# Altium PCB TailLightsPrototypeRev3LEDs.PcbDoc
Units mm, origin at the board's own origin, x right, y up, seen from the top; angles counter-clockwise.
Board outline 64.13 x 24.64 mm, 2 copper layers (Top Layer, Bottom Layer); 13 components, 41 nets, 38 pads, 427 vias.
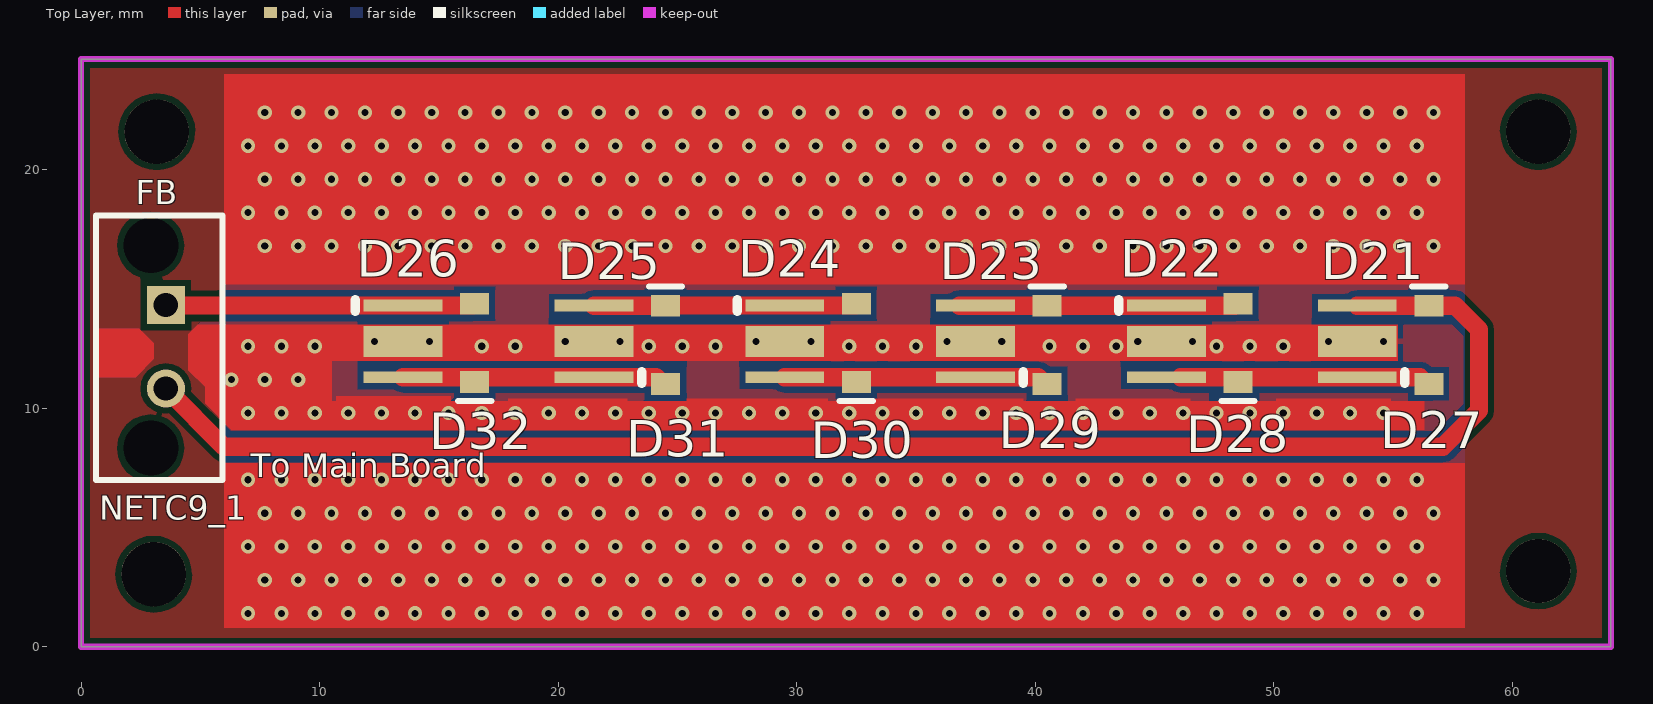
[diagram p0: Top Layer view]
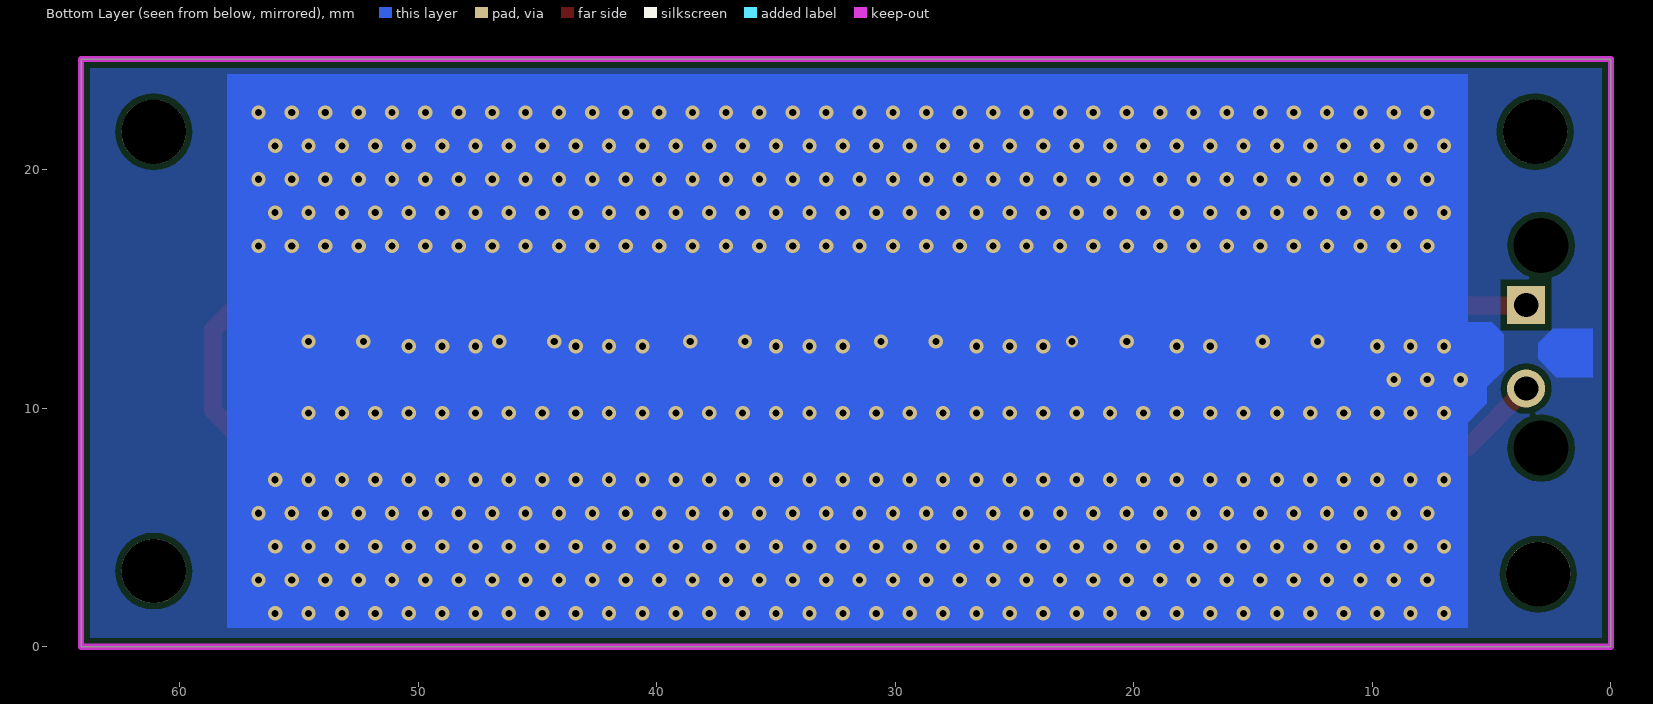
[diagram p1: Bottom Layer view, seen from below]
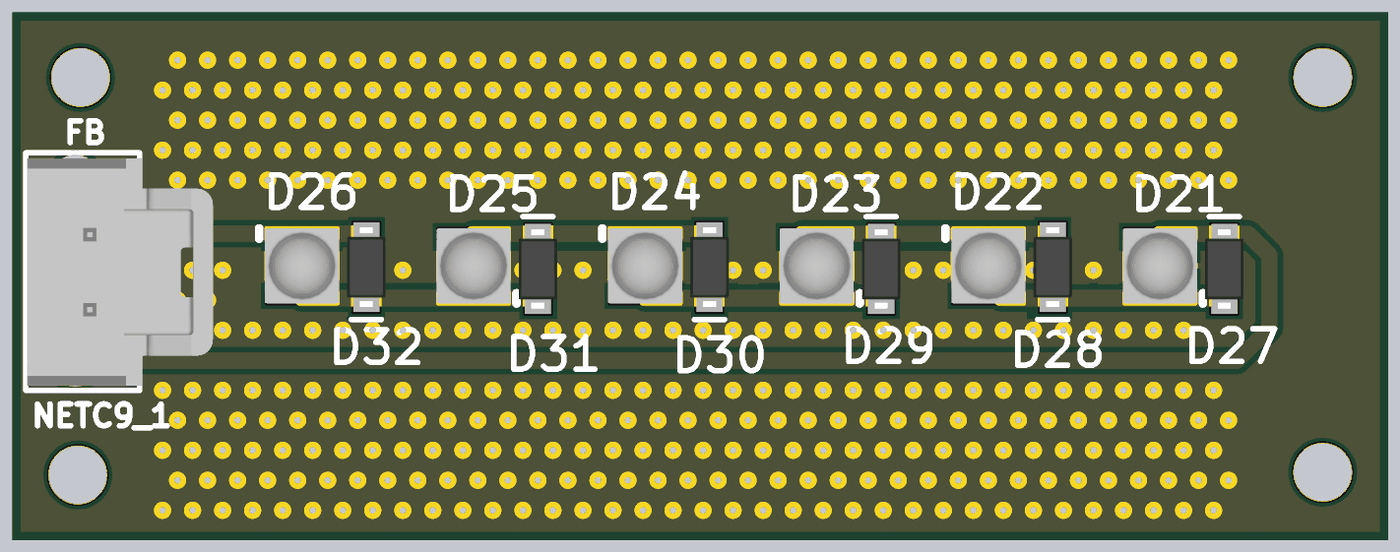
[diagram p2: 3D render of the assembled board from above, using the file's embedded part models]

## Layer stack, top to bottom
Top Solder: solder mask 0.0102, Solder Resist, Dk 3.5
Top Layer: signal copper 0.0356
Dielectric 1: dielectric 0.32, FR-4, Dk 4.8
Bottom Layer: signal copper 0.0356
Bottom Solder: solder mask 0.0102, Solder Resist, Dk 3.5

## Board outline
0,0 64.135,0 64.135,24.638 0,24.638

## Design rules (kind name [scope] priority, off if disabled: settings)
Clearance [All] p1: gap=0.254 ignorepadtopadclearanceinfootprint=FALSE except(0: Arc-Hole Track-Hole SMDPad-Hole THPad-Hole Via-Hole Fill-Hole Poly-Hole Region-Hole Text-Hole)
PolygonConnect [All] p1: connectstyle=Relief reliefconductorwidth=0.254 reliefentries=4 polygonreliefangle="90 Angle" airgapwidth=0.254
RoutingVias [All] p1: holewidth=0.711 width=1.27 viastyle="Through Hole" minholewidth=0.711 minwidth=1.27 maxholewidth=0.711 maxwidth=1.27
SolderMaskExpansion [All] p1: expansion=0.102 istentingtop=FALSE
Width [All] p1: maxlimit=0.762 minlimit=0.254 preferedwidth=0.254 bottomlayer_maxwidth=0.254 minimp=50.000000 maximp=50.000000 favimp=50.000000
30 further rules are at their usual default settings.

## Classes and differential pairs
component class TailLightPrototypeRev3LEDs: D21 D22 D23 D24 D25 D26 D27 D28 D29 D30 D31 "To Main Board"

## Components (designator, comment, footprint, x,y, rotation, side; value= is the part's Value field where it differs from the comment)
D21 "LED XLAMP XP-E RED SMD" "LED CREE XP-E2 1414 2-SMD" 53.5,12.8 r270 top
D22 "LED XLAMP XP-E RED SMD" "LED CREE XP-E2 1414 2-SMD" 45.5,12.8 r90 top
D23 "LED XLAMP XP-E RED SMD" "LED CREE XP-E2 1414 2-SMD" 37.5,12.8 r270 top
D24 "LED XLAMP XP-E RED SMD" "LED CREE XP-E2 1414 2-SMD" 29.5,12.8 r90 top
D25 "LED XLAMP XP-E RED SMD" "LED CREE XP-E2 1414 2-SMD" 21.5,12.8 r270 top
D26 "LED XLAMP XP-E RED SMD" "LED CREE XP-E2 1414 2-SMD" 13.5,12.8 r90 top
D27 "DIODE ZENER 2.4V 500MW SOD123" "DIODE SOD123" 56.5,14.3 r270 top
D28 "DIODE ZENER 2.4V 500MW SOD123" "DIODE SOD123" 48.5,11.1 r90 top
D29 "DIODE ZENER 2.4V 500MW SOD123" "DIODE SOD123" 40.5,14.3 r270 top
D30 "DIODE ZENER 2.4V 500MW SOD123" "DIODE SOD123" 32.5,11.1 r90 top
D31 "DIODE ZENER 2.4V 500MW SOD123" "DIODE SOD123" 24.5,14.3 r270 top
D32 "DIODE ZENER 2.4V 500MW SOD123" "DIODE SOD123" 16.5,11.1 r90 top
"To Main Board" "CONN 2POS ULTRA-FIT 0.138\"" "CONN, 2POS ULTRA-FIT" 3.556,14.327 r270 top (schematic designator P6)

## Footprints (in the part's own frame and the unit in brackets; to place one, negate y for a bottom-side part, rotate by r counter-clockwise, add the part's x,y. Pads: shape width x height; smd on the part's side, far side on the other; paste and mask are expansions set on the pad)
"CONN, 2POS ULTRA-FIT" [mm] "2 Positions Header, Shrouded Connector 0.138\" (3.50mm) Through Hole Gold"
  rect 1.6x1.6 hole 1.02: 1(0,0)
  round 1.6 hole 1.02: 2(3.5,0)
  round 1.6 hole 2.3: ""(-2.5,-0.63) ""(6,-0.63)
  silkscreen extent -3.74,-2.93 7.33,2.37, body extent -3.48,-2.87 7.12,5.79, height 13.85
"DIODE SOD123" [mm]
  rect 0.91x1.22 smd: 1(0,0) 2(3.28,0)
  silkscreen extent -0.8,-0.7 -0.8,0.7, body extent -0.22,-0.9 3.49,0.9, height 1.35
"LED CREE XP-E2 1414 2-SMD" [mm]
  rect 0.5x3.3 smd: 1(-1.5,0) 3(1.5,0)
  rect 1.3x3.3 smd: 2(0,0)
  silkscreen extent 1.27,2 1.75,2, body extent -1.73,-1.73 1.73,1.73, height 2.28

## Part data
D21 D22 D23 D24 D25 D26: "LED Lighting Color XLamp?XP-E2 Red 623nm (620nm ~ 625nm) 1414 (3535 Metric)", Case/Package=SMD/SMT, Color=Red, Forward Voltage=2.2V, Manufacturer=Cree, Manufacturer Part Number=XPEBRD-L1-0000-00902, Max Current Rating=1A, Supplier Part Number 1=XPEBRD-L1-0000-00902CT-ND, Test Current=350mA, Test Temperature=25°C, Thermal Resistance of Package=5°C/W, Lead Free="Lead Free", Mount="Surface Mount", Packaging="Tape and Reel", Pricing 1="1 = 2.00000, 10 = 1.90000, 100 = 1.69980, 250 = 1.54584, 500 = 1.44786 (USD)", RoHS=Yes, Stock 1=1640, Supplier 1=Digi-Key, Viewing Angle=130°, Wavelength=625nm
D27 D28 D29 D30 D31 D32: "Zener Diode 2.4V 500mW ?% Surface Mount SOD-123", Case/Package=SOD-123-2, Forward Voltage=900mV, Manufacturer 1=Diodes, Manufacturer Part Number 1=MMSZ5221B-7-F, Max Operating Temperature=150°C, Max Power Dissipation=500mW, Max Reverse Leakage Current=100uA, Min Operating Temperature=-65°C, Package Quantity=3000, Supplier Part Number 1=MMSZ5221B-FDICT-ND, Test Current=20mA, Tolerance=5%, Voltage Rating (DC)=2.4V, ComponentLink1Description=https://datasheet.ciiva.com/34302/1541079-34302404.pdf?src-supplier=Jameco, ComponentLink1URL=https://datasheet.ciiva.com/34302/1541079-34302404.pdf?src-supplier=Jameco, ComponentLink2Description=https://datasheet.ciiva.com/15142/getdatasheetpartid-61111-15142284.pdf?src-supplier=Verical, ComponentLink2URL=https://datasheet.ciiva.com/15142/getdatasheetpartid-61111-15142284.pdf?src-supplier=Verical, ComponentLink3Description=https://datasheet.ciiva.com/4734/ds18010-38133-4734214.pdf?src-supplier=Mouser, ComponentLink3URL=https://datasheet.ciiva.com/4734/ds18010-38133-4734214.pdf?src-supplier=Mouser, ComponentLink4Description=https://datasheet.ciiva.com/890/ds18010-890793.pdf?src-supplier=Digi-Key, ComponentLink4URL=https://datasheet.ciiva.com/890/ds18010-890793.pdf?src-supplier=Digi-Key, ComponentLink5Description=https://datasheet.ciiva.com/890/ds18010-890794.pdf?src-supplier=Digi-Key, ComponentLink5URL=https://datasheet.ciiva.com/890/ds18010-890794.pdf?src-supplier=Digi-Key, Element Configuration=Single, Height=1.35mm, Impedance=30R, Lead Free="Lead Free", Length=3.85mm, Mount="Surface Mount", Number of Pins=2, Packaging="Tape and Reel", Peak Reverse Current=100uA, Power Dissipation=500mW, Power Rating=500mW, Pricing 1="1=0.19000, 10=0.17800, 100=0.07440, 500=0.05840, 1000=0.04056 (USD)", Radiation Hardening=No, RoHS=Yes, Stock 1=37190, Supplier 1=Digi-Key, Termination=SMD/SMT, Voltage Tolerance=5%, Weight=0.000353oz, Width=1.7mm, Working Voltage=2.4V, Zener Current=100uA, Zener Voltage=2.4V
"To Main Board": "2 Positions Header, Shrouded Connector 0.138\" (3.50mm) Through Hole Gold", Current Rating=-, Insulation Color=Black, Manufacturer 1="Molex, LLC", Manufacturer Part Number 1=1722861302, Material Flammability Rating="UL94 V-0", Operating Temperature="-40°C ~ 120°C", Supplier Part Number 1=WM11673-ND, Voltage=400V, ComponentLink1Description=http://www.molex.com/pdm_docs/sd/1722861302_sd.pdf, ComponentLink1URL=http://www.molex.com/pdm_docs/sd/1722861302_sd.pdf, Connector Type=Header, Contact Finish - Mating=Gold, Contact Finish - Post=Tin, Contact Finish Thickness - Mating="30µin (0.76µm)", Contact Finish Thickness - Post="60µin (1.52µm)", Contact Length - Mating=-, Contact Length - Post="0.126\" (3.20mm)", Contact Material="Copper Alloy", Contact Shape=Square, Contact Type="Male Pin", Fastening Type="Latch Holder", Ingress Protection=-, Insulation Height="0.465\" (11.80mm)", Insulation Material="Liquid Crystal Polymer (LCP)", Mated Stacking Heights=26.99mm, Mounting Type="Through Hole", Number of Positions=2, Number of Positions Loaded=All, Number of Rows=1, Overall Contact Length=-, Packaging=Tray, Part Status=Active, Pitch - Mating="0.138\" (3.50mm)", Row Spacing - Mating=-, Series=UltraFit, Shrouding="Shrouded - 4 Wall", Style="Board to Board or Cable", Supplier 1=Digi-Key, Termination="Kinked Pin, Solder"

## Free pads (board coordinates)
  round 2.7 hole 2.7: ""(3.048,3.048) ""(3.175,21.59) ""(61.087,3.175) ""(61.087,21.59)

## Via types
v1: diameter 0.6, hole 0.3, Top Layer to Bottom Layer, 426 vias
v2: diameter 0.5, hole 0.3, Top Layer to Bottom Layer, 1 vias

## Nets (pads, with @x,y where several pads share a name; then routed paths per layer and width w, separated by ;. In a path a pad name is that pad's centre, name@x,y a point inside that pad or via, vN(x,y) a via of type N, cw(c..) or ccw(c..) an arc to the next point about the centre after c; other vN are vias at no path point)
6V6: 
CTRL: 
FB: "To Main Board.1" D26.3 D32.2 | length 12.9
  Top Layer w0.254: 3.556,14.327 3.58,14.303
  Top Layer w0.762: 3.58,14.303 13.5,14.303 D32.2@16.4,14.303
GND: 
NetC2_1: 
NetC3_1: 
NetC4_1: 
NetC5_2: 
NetC9_1: 
NetC12_1: 
NetC17_1: 
NetD1_3: 
NetD2_3: 
NetD3_3: 
NetD4_3: 
NetD7_3: 
NetD8_3: 
NetD9_1: 
NetD10_3: 
NetD12_3: 
NetD13_3: 
NetD14_3: 
NetD15_1: 
NetD16_2: 
NetD19_1: 
NetD20_2: 
NetD21_2: D21.2 D22.2 D23.2 D24.2 D25.2 D26.2
  other v1: 7,1.4 8.4,1.4 9.8,1.4 11.2,1.4 12.6,1.4 14,1.4 15.4,1.4 16.8,1.4 18.2,1.4 19.6,1.4 21,1.4 22.4,1.4 23.8,1.4 25.2,1.4 26.6,1.4 28,1.4 29.4,1.4 30.8,1.4 32.2,1.4 33.6,1.4 35,1.4 36.4,1.4 37.8,1.4 39.2,1.4 40.6,1.4 42,1.4 43.4,1.4 44.8,1.4 46.2,1.4 47.6,1.4 49,1.4 50.4,1.4 51.8,1.4 53.2,1.4 54.6,1.4 56,1.4 7.7,2.8 9.1,2.8 10.5,2.8 11.9,2.8 13.3,2.8 14.7,2.8 16.1,2.8 17.5,2.8 18.9,2.8 20.3,2.8 21.7,2.8 23.1,2.8 24.5,2.8 25.9,2.8 27.3,2.8 28.7,2.8 30.1,2.8 31.5,2.8 32.9,2.8 34.3,2.8 35.7,2.8 37.1,2.8 38.5,2.8 39.9,2.8 41.3,2.8 42.7,2.8 44.1,2.8 45.5,2.8 46.9,2.8 48.3,2.8 49.7,2.8 51.1,2.8 52.5,2.8 53.9,2.8 55.3,2.8 56.7,2.8 7,4.2 8.4,4.2 9.8,4.2 11.2,4.2 12.6,4.2 14,4.2 15.4,4.2 16.8,4.2 18.2,4.2 19.6,4.2 21,4.2 22.4,4.2 23.8,4.2 25.2,4.2 26.6,4.2 28,4.2 29.4,4.2 30.8,4.2 32.2,4.2 33.6,4.2 35,4.2 36.4,4.2 37.8,4.2 39.2,4.2 40.6,4.2 42,4.2 43.4,4.2 44.8,4.2 46.2,4.2 47.6,4.2 49,4.2 50.4,4.2 51.8,4.2 53.2,4.2 54.6,4.2 56,4.2 7.7,5.6 9.1,5.6 10.5,5.6 11.9,5.6 13.3,5.6 14.7,5.6 16.1,5.6 17.5,5.6 18.9,5.6 20.3,5.6 21.7,5.6 23.1,5.6 24.5,5.6 25.9,5.6 27.3,5.6 28.7,5.6 30.1,5.6 31.5,5.6 32.9,5.6 34.3,5.6 35.7,5.6 37.1,5.6 38.5,5.6 39.9,5.6 41.3,5.6 42.7,5.6 44.1,5.6 45.5,5.6 46.9,5.6 48.3,5.6 49.7,5.6 51.1,5.6 52.5,5.6 53.9,5.6 55.3,5.6 56.7,5.6 7,7 8.4,7 9.8,7 11.2,7 12.6,7 14,7 15.4,7 16.8,7 18.2,7 19.6,7 21,7 22.4,7 23.8,7 25.2,7 26.6,7 28,7 29.4,7 30.8,7 32.2,7 33.6,7 35,7 36.4,7 37.8,7 39.2,7 40.6,7 42,7 43.4,7 44.8,7 46.2,7 47.6,7 49,7 50.4,7 51.8,7 53.2,7 54.6,7 56,7 7,9.8 8.4,9.8 9.8,9.8 11.2,9.8 12.6,9.8 14,9.8 15.4,9.8 16.8,9.8 18.2,9.8 19.6,9.8 21,9.8 22.4,9.8 23.8,9.8 25.2,9.8 26.6,9.8 28,9.8 29.4,9.8 30.8,9.8 32.2,9.8 33.6,9.8 35,9.8 36.4,9.8 37.8,9.8 39.2,9.8 40.6,9.8 42,9.8 43.4,9.8 44.8,9.8 46.2,9.8 47.6,9.8 49,9.8 50.4,9.8 51.8,9.8 53.2,9.8 54.6,9.8 6.3,11.2 7.7,11.2 9.1,11.2 7,12.6 8.4,12.6 9.8,12.6 16.8,12.6 18.2,12.6 23.8,12.6 25.2,12.6 26.6,12.6 32.2,12.6 33.6,12.6 35,12.6 40.6,12.6 42,12.6 43.4,12.6 47.6,12.6 49,12.6 50.4,12.6 12.3,12.8 14.6,12.8 20.3,12.8 28.3,12.8 30.6,12.8 36.3,12.8 38.6,12.8 44.3,12.8 46.6,12.8 52.3,12.8 54.6,12.8 7.7,16.8 9.1,16.8 10.5,16.8 11.9,16.8 13.3,16.8 14.7,16.8 16.1,16.8 17.5,16.8 18.9,16.8 20.3,16.8 21.7,16.8 23.1,16.8 24.5,16.8 25.9,16.8 27.3,16.8 28.7,16.8 30.1,16.8 31.5,16.8 32.9,16.8 34.3,16.8 35.7,16.8 37.1,16.8 38.5,16.8 39.9,16.8 41.3,16.8 42.7,16.8 44.1,16.8 45.5,16.8 46.9,16.8 48.3,16.8 49.7,16.8 51.1,16.8 52.5,16.8 53.9,16.8 55.3,16.8 56.7,16.8 7,18.2 8.4,18.2 9.8,18.2 11.2,18.2 12.6,18.2 14,18.2 15.4,18.2 16.8,18.2 18.2,18.2 19.6,18.2 21,18.2 22.4,18.2 23.8,18.2 25.2,18.2 26.6,18.2 28,18.2 29.4,18.2 30.8,18.2 32.2,18.2 33.6,18.2 35,18.2 36.4,18.2 37.8,18.2 39.2,18.2 40.6,18.2 42,18.2 43.4,18.2 44.8,18.2 46.2,18.2 47.6,18.2 49,18.2 50.4,18.2 51.8,18.2 53.2,18.2 54.6,18.2 56,18.2 7.7,19.6 9.1,19.6 10.5,19.6 11.9,19.6 13.3,19.6 14.7,19.6 16.1,19.6 17.5,19.6 18.9,19.6 20.3,19.6 21.7,19.6 23.1,19.6 24.5,19.6 25.9,19.6 27.3,19.6 28.7,19.6 30.1,19.6 31.5,19.6 32.9,19.6 34.3,19.6 35.7,19.6 37.1,19.6 38.5,19.6 39.9,19.6 41.3,19.6 42.7,19.6 44.1,19.6 45.5,19.6 46.9,19.6 48.3,19.6 49.7,19.6 51.1,19.6 52.5,19.6 53.9,19.6 55.3,19.6 56.7,19.6 7,21 8.4,21 9.8,21 11.2,21 12.6,21 14,21 15.4,21 16.8,21 18.2,21 19.6,21 21,21 22.4,21 23.8,21 25.2,21 26.6,21 28,21 29.4,21 30.8,21 32.2,21 33.6,21 35,21 36.4,21 37.8,21 39.2,21 40.6,21 42,21 43.4,21 44.8,21 46.2,21 47.6,21 49,21 50.4,21 51.8,21 53.2,21 54.6,21 56,21 7.7,22.4 9.1,22.4 10.5,22.4 11.9,22.4 13.3,22.4 14.7,22.4 16.1,22.4 17.5,22.4 18.9,22.4 20.3,22.4 21.7,22.4 23.1,22.4 24.5,22.4 25.9,22.4 27.3,22.4 28.7,22.4 30.1,22.4 31.5,22.4 32.9,22.4 34.3,22.4 35.7,22.4 37.1,22.4 38.5,22.4 39.9,22.4 41.3,22.4 42.7,22.4 44.1,22.4 45.5,22.4 46.9,22.4 48.3,22.4 49.7,22.4 51.1,22.4 52.5,22.4 53.9,22.4 55.3,22.4 56.7,22.4
  other v2: 22.6,12.8
NetD21_3: D21.3 D22.1 D27.2 D28.1 | length 10.4
  Top Layer w0.762: D22.1@46.101,11.3 48.4,11.3 D21.3 56.12,11.3 D27.2@56.4,11.02
NetD22_3: D22.3 D23.1 D28.2 D29.1 | length 11.6
  Top Layer w0.762: D23.1@36.83,14.3 40.4,14.3 D22.3 D28.2@48.4,14.3
NetD23_3: D23.3 D24.1 D29.2 D30.1 | length 11
  Top Layer w0.762: D24.1 D23.3 40.12,11.3 D29.2@40.4,11.02
NetD24_3: D24.3 D25.1 D30.2 D31.1 | length 11.1
  Top Layer w0.762: D25.1 D31.1 ; D31.1@24.384,14.305 29.5,14.305 D30.2@32.466,14.305
NetD25_3: D25.3 D26.1 D31.2 D32.1 | length 11.1
  Top Layer w0.254: D31.2@24.309,11.1 D31.2@24.384,11.025
  Top Layer w0.762: D26.1 D25.3 24.109,11.3 D31.2@24.347,11.063
NetR2_2: 
NetR3_2: 
NetR4_2: 
NetR8_2: 
NetR9_2: 
SW: 
VBAT: 
VDD: 
VIN: "To Main Board.2" D21.1 D27.1 | length 65.6
  Top Layer w0.762: 3.556,10.827 6.001,8.382 57.082,8.382 58.6,9.9 58.6,13.3 57.6,14.3 56.4,14.3 D21.1
pads on no net: "To Main Board."

## Polygon pours and split planes (outlines as drawn)
NetD21_2 on Bottom Solder (solid): 5.7,24.638 59,24.638 59,0 5.7,0
NetD21_2 on Bottom Layer "Bottom Layer-NetD21_2 1" (solid, pour order 24): 0,24.638 64.135,24.638 64.135,0 0,0
NetD21_2 on Bottom Layer "Bottom Layer-NetD21_2" (solid, pour order 16): 0,24.638 0,0 64.135,0 64.135,24.638
NetD21_2 on Top Layer "Top Layer-NetD21_2 1" (solid, pour order 20): 3.175,21.59 61.087,21.59 61.087,3.175 60.96,3.048 3.048,3.048 3.048,21.463
NetD21_2 on Top Layer "Top Layer-NetD21_2" (solid, pour order 18): 0,24.638 0,0 64.135,0 64.135,24.638

## Keep-outs
Keep-Out Layer:
  the board outline again, w0.254

## Other copper
Top Layer:
  pour cut-out: 49.1,10.3 49.1,10.7 49.4,10.7 49.4,10.3
  pour cut-out: 47.3,10.3 47.3,10.7 47.6,10.7 47.6,10.3
  region net NetD21_2: 50.1,10.3 54.9,10.3 54.9,10.4 50.1,10.4
  region net NetD21_2: 41.7,10.3 41.7,10.4 46.5,10.4 46.5,10.3
  region net NetD21_2: 33.3,10.3 33.3,10.4 39.5,10.4 39.5,10.3
  pour cut-out: 55.4,13.5 57.6,13.5 57.6,13.7 55.4,13.7
  pour cut-out: 39.4,13.5 43.7,13.5 43.7,13.8 39.4,13.8
  pour cut-out: 11.6,12 25.4,12 25.4,10.3 25.2,10.3 25.2,11.6 24.5,11.6 24.3,11.8 11.6,11.8
  pour cut-out: 23.3,13.5 27.6,13.5 27.6,13.8 23.3,13.8
  pour cut-out: 11.6,12
  pour cut-out: 25.3,10.3
  region net NetD21_2: 25.4,10.4 25.4,10.1 31.3,10.1 31.3,10.4
  region net NetD21_2: 25.3,10.3
  region net NetD21_2: 17.9,10.4 22.9,10.4 22.9,9.9 17.9,9.9
  region net NetD21_2: 10.7,10 15.5,10 15.5,10.5 10.7,10.5
  region net NetD21_2: 10.5,10.4
  region net NetD21_2: 4.9,13.5 4.5,13.1 4.5,11.6 5.2,10.9 5.2,10.2 6.3,9.1 10.5,9.1 10.5,13.5
  region net NetD21_2: 6,15.2 58,15.2 58,18.5 58,24 6,24
  region net NetD21_2: 6,0.8 6,7.7 58,7.7 58,6.1 58,0.8
  region net NetD21_2: 10.5,13.5 55.2,13.5 55.2,12 10.5,12
  pour cut-out: 17.773,10.362
  pour cut-out: 17.66,9.927
  region net NetD21_2: 10.2,10.3 56.3,10.3 56.3,9.1 10.2,9.1
  region net NetD21_2: 17.66,9.927
  region net NetD21_2: 16.154,10.362
  region net NetD21_2: 17.882,10.407
  region net NetD21_2: 0.762,13.335 2.44,13.335 3.048,12.727 3.048,12.065 2.286,11.303 0.762,11.303
Bottom Layer:
  rectangle net NetD21_2: 10.414,11.176 58,14.732
  region net NetD21_2: 5,13.6 4.5,13.1 4.5,11.6 5.2,10.9 5.2,10.2 6.3,9.1 10.2,9.1 10.2,13.6
  region net NetD21_2: 0.762,13.335 2.44,13.335 3.048,12.727 3.048,12.065 2.286,11.303 0.762,11.303
  region net NetD21_2: 6,15.2 58,15.2 58,18.5 58,24 6,24
  region net NetD21_2: 6,0.8 6,7.7 58,7.7 58,6.1 58,0.8
  region net NetD21_2: 6,15.24 6,7.6 58,7.6 58,15.24

## Silkscreen, mask and mechanical layers (free items; w line width, h text height)
Top Overlay:
  text "FB" at 2.286,18.542 h1.02
  text "NETC9_1" at 0.762,5.334 h1.02